# EAGLE board sonar-4up (EAGLE 9.5.2)
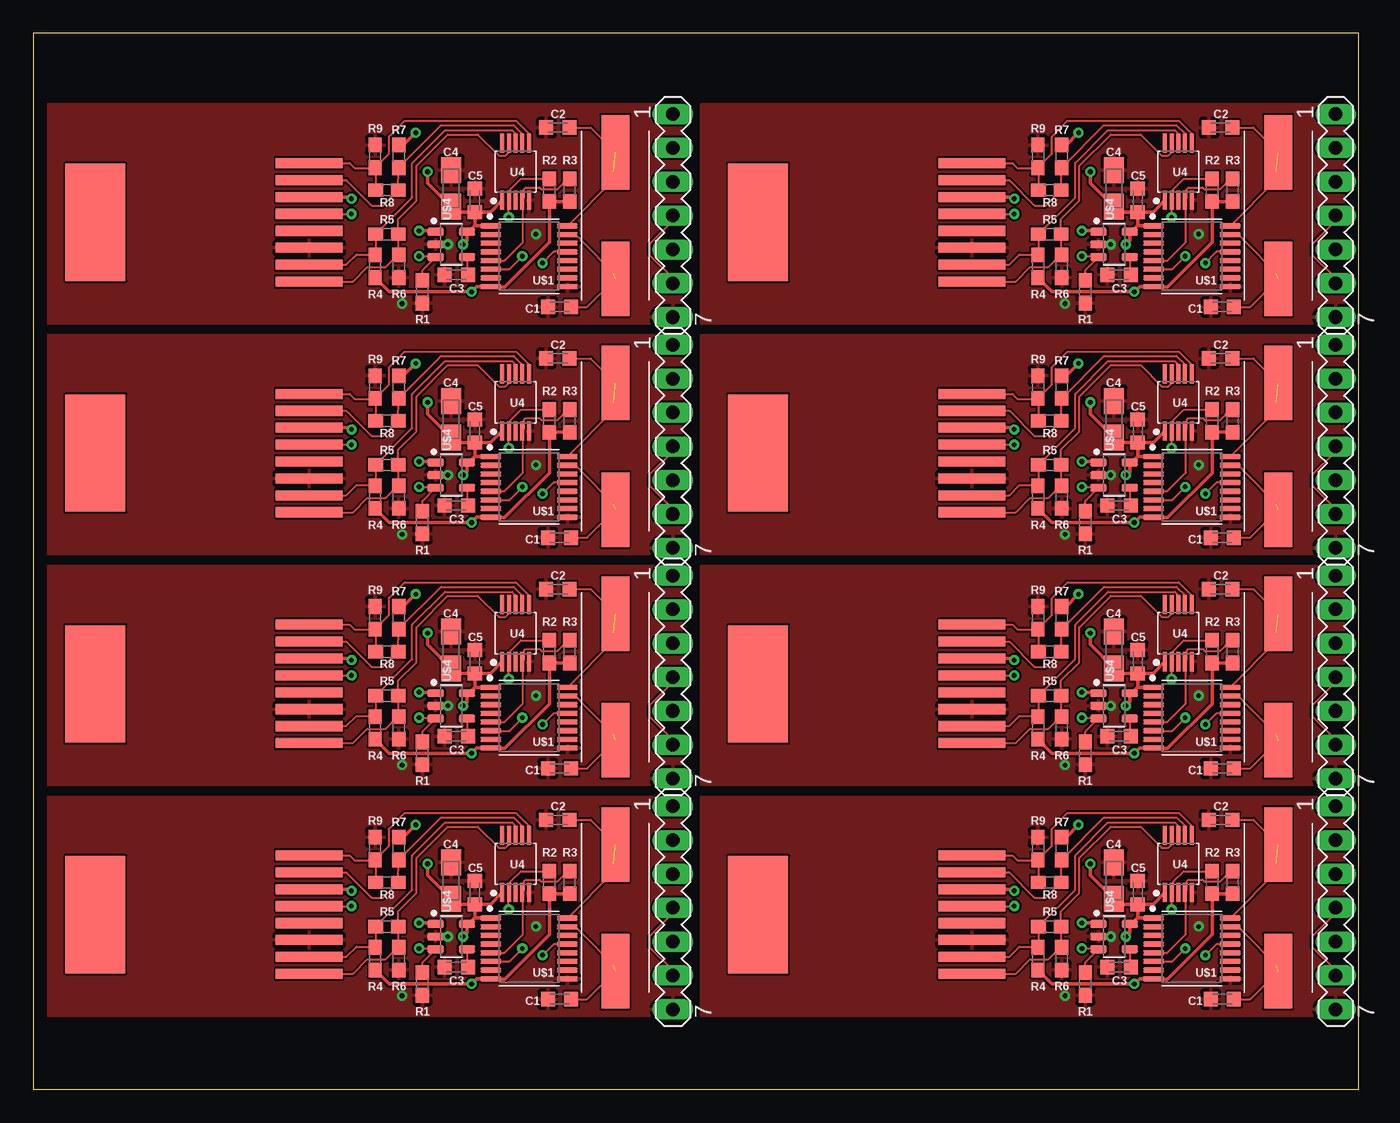
[diagram p0: board, top side]
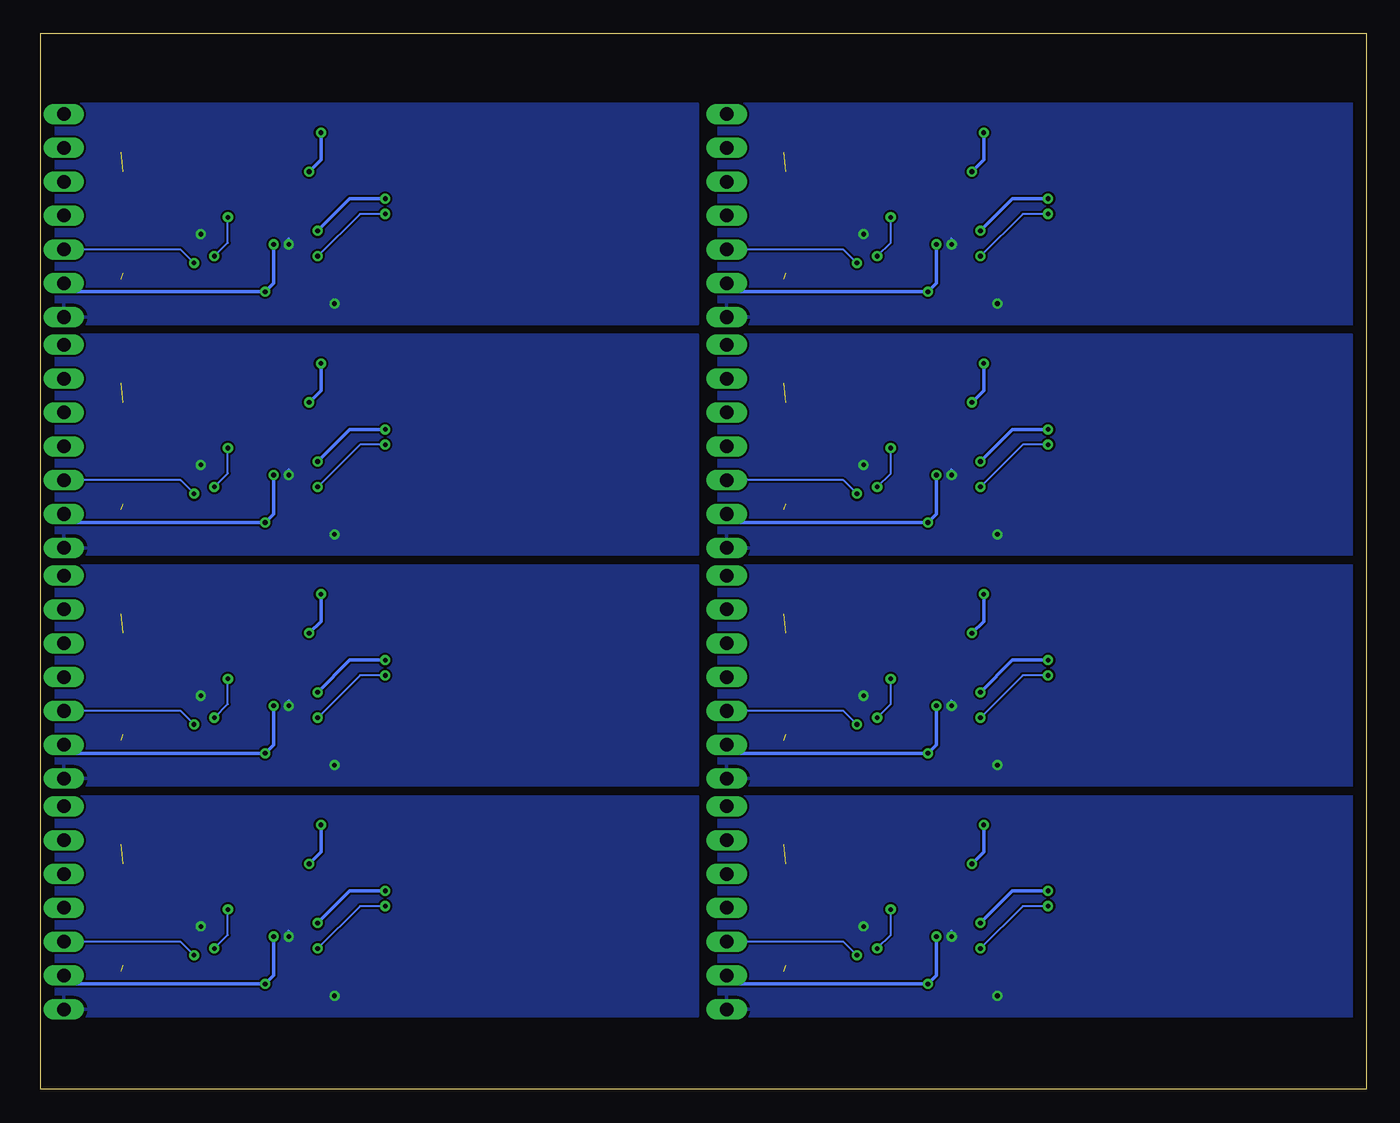
[diagram p1: board, bottom side, seen from below]

Size 99.5 x 79.28 mm. Coordinates in mm from the lower left corner, seen from the top.
Outline: 0,0 99.5,0 99.5,22.32 99.5,39.64 99.5,56.96 99.5,79.28 0,79.28 0,56.96 0,39.64 0,22.32 0,0
Copper layers (1*16): Top 0.035mm / dielectric 1.5mm / Bottom 0.035mm
Design rules "default": minimum track width 6mil, minimum drill 0.35mm, track to track 6mil, track to pad 6mil, pad to pad 6mil, via to via 6mil, smd to smd 6mil, copper to edge 40mil, drill to drill 6mil, minimum pad ring 10mil, minimum via ring 8mil, stop-mask expansion 4mil, vias tented up to drill 0mil, thermal gap 10mil

## Footprints (pad centres in the part's own frame; a part is rotated, then mirrored left to right if it is on the bottom)
C0603K = smd 1.05 x 1.08: 1 -0.875,0; 2 0.875,0
A/3216-18R = smd 1.95 x 1.5: + 1.375,0; - -1.375,0
85513-5009 = smd 0.76 x 5: 1 4.445,0; 2 3.175,0; 3 1.905,0; 4 0.635,0; 5 -0.635,0; 6 -1.905,0; 7 -3.175,0; 8 -4.445,0 | smd 8.8 x 4.5: P$1 0,16.05
0603 = smd 1.1 x 1: 1 -0.85,0; 2 0.85,0
MA07-1 = drill 1.016 long: 1 -7.62,0; 2 -5.08,0; 3 -2.54,0; 4 0,0; 5 2.54,0; 6 5.08,0; 7 7.62,0
SOP50P490X110-10 = smd 1.438 x 0.297: 1 -2.145,1; 2 -2.145,0.5; 3 -2.145,0; 4 -2.145,-0.5; 5 -2.145,-1; 6 2.145,-1; 7 2.145,-0.5; 8 2.145,0; 9 2.145,0.5; 10 2.145,1
SOP65P640X110-16 = smd 1.572 x 0.407: 1 -2.872,2.275; 2 -2.872,1.625; 3 -2.872,0.975; 4 -2.872,0.325; 5 -2.872,-0.325; 6 -2.872,-0.975; 7 -2.872,-1.625; 8 -2.872,-2.275; 9 2.872,-2.275; 10 2.872,-1.625; 11 2.872,-0.975; 12 2.872,-0.325; 13 2.872,0.325; 14 2.872,0.975; 15 2.872,1.625; 16 2.872,2.275
ABLS = smd 5.588 x 2.108: P$1 -4.75,0; P$2 4.75,0
SOT95P280X145-5 = smd 1.262 x 0.609: 1 -1.175,0.95; 2 -1.175,0; 3 -1.175,-0.95; 4 1.175,-0.95; 5 1.175,0.95

## Placement (x,y rotation side)
C1  22pf  [C0603K]  39.5,6.78 180 top
C2  33pf  [C0603K]  39.37,20.24 180 top
C3  [C0603K]  31.75,9.19 180 top
C4  6.8uf  [A/3216-18R]  31.37,15.67 270 top
C5  .1uf  [C0603K]  33.15,14.78 90 top
C6  22pf  [C0603K]  39.5,24.1 180 top
C7  33pf  [C0603K]  39.37,37.56 180 top
C8  [C0603K]  31.75,26.51 180 top
C9  6.8uf  [A/3216-18R]  31.37,32.99 270 top
C10  .1uf  [C0603K]  33.15,32.1 90 top
C11  22pf  [C0603K]  39.5,41.42 180 top
C12  33pf  [C0603K]  39.37,54.88 180 top
C13  [C0603K]  31.75,43.83 180 top
C14  6.8uf  [A/3216-18R]  31.37,50.31 270 top
C15  .1uf  [C0603K]  33.15,49.42 90 top
C16  22pf  [C0603K]  39.5,58.74 180 top
C17  33pf  [C0603K]  39.37,72.2 180 top
C18  [C0603K]  31.75,61.15 180 top
C19  6.8uf  [A/3216-18R]  31.37,67.63 270 top
C20  .1uf  [C0603K]  33.15,66.74 90 top
C21  22pf  [C0603K]  89.25,6.78 180 top
C22  33pf  [C0603K]  89.12,20.24 180 top
C23  [C0603K]  81.5,9.19 180 top
C24  6.8uf  [A/3216-18R]  81.12,15.67 270 top
C25  .1uf  [C0603K]  82.9,14.78 90 top
C26  22pf  [C0603K]  89.25,24.1 180 top
C27  33pf  [C0603K]  89.12,37.56 180 top
C28  [C0603K]  81.5,26.51 180 top
C29  6.8uf  [A/3216-18R]  81.12,32.99 270 top
C30  .1uf  [C0603K]  82.9,32.1 90 top
C31  22pf  [C0603K]  89.25,41.42 180 top
C32  33pf  [C0603K]  89.12,54.88 180 top
C33  [C0603K]  81.5,43.83 180 top
C34  6.8uf  [A/3216-18R]  81.12,50.31 270 top
C35  .1uf  [C0603K]  82.9,49.42 90 top
C36  22pf  [C0603K]  89.25,58.74 180 top
C37  33pf  [C0603K]  89.12,72.2 180 top
C38  [C0603K]  81.5,61.15 180 top
C39  6.8uf  [A/3216-18R]  81.12,67.63 270 top
C40  .1uf  [C0603K]  82.9,66.74 90 top
J1  95501-6889VERT  [85513-5009]  20.7,30.45 90 top
J2  95501-6889VERT  [85513-5009]  20.7,13.13 90 top
J3  95501-6889VERT  [85513-5009]  20.7,47.77 90 top
J4  95501-6889VERT  [85513-5009]  20.7,65.09 90 top
J5  95501-6889VERT  [85513-5009]  70.45,13.13 90 top
J6  95501-6889VERT  [85513-5009]  70.45,30.45 90 top
J7  95501-6889VERT  [85513-5009]  70.45,47.77 90 top
J8  95501-6889VERT  [85513-5009]  70.45,65.09 90 top
R1  100k  [0603]  29.21,7.92 90 top
R2  4.7k  [0603]  38.74,15.54 90 top
R3  4.7k  [0603]  40.26,15.54 90 top
R4  330  [0603]  25.65,9.83 270 top
R5  100  [0603]  26.54,12.24 180 top
R6  300  [0603]  27.43,9.83 90 top
R7  330  [0603]  27.43,18.08 90 top
R8  100  [0603]  26.54,15.54 0 top
R9  300  [0603]  25.65,18.08 270 top
R10  100k  [0603]  29.21,25.24 90 top
R11  4.7k  [0603]  38.74,32.86 90 top
R12  4.7k  [0603]  40.26,32.86 90 top
R13  330  [0603]  25.65,27.15 270 top
R14  100  [0603]  26.54,29.56 180 top
R15  300  [0603]  27.43,27.15 90 top
R16  330  [0603]  27.43,35.4 90 top
R17  100  [0603]  26.54,32.86 0 top
R18  300  [0603]  25.65,35.4 270 top
R19  100k  [0603]  29.21,42.56 90 top
R20  4.7k  [0603]  38.74,50.18 90 top
R21  4.7k  [0603]  40.26,50.18 90 top
R22  330  [0603]  25.65,44.47 270 top
R23  100  [0603]  26.54,46.88 180 top
R24  300  [0603]  27.43,44.47 90 top
R25  330  [0603]  27.43,52.72 90 top
R26  100  [0603]  26.54,50.18 0 top
R27  300  [0603]  25.65,52.72 270 top
R28  100k  [0603]  29.21,59.88 90 top
R29  4.7k  [0603]  38.74,67.5 90 top
R30  4.7k  [0603]  40.26,67.5 90 top
R31  330  [0603]  25.65,61.79 270 top
R32  100  [0603]  26.54,64.2 180 top
R33  300  [0603]  27.43,61.79 90 top
R34  330  [0603]  27.43,70.04 90 top
R35  100  [0603]  26.54,67.5 0 top
R36  300  [0603]  25.65,70.04 270 top
R37  100k  [0603]  78.96,7.92 90 top
R38  4.7k  [0603]  88.49,15.54 90 top
R39  4.7k  [0603]  90.01,15.54 90 top
R40  330  [0603]  75.4,9.83 270 top
R41  100  [0603]  76.29,12.24 180 top
R42  300  [0603]  77.18,9.83 90 top
R43  330  [0603]  77.18,18.08 90 top
R44  100  [0603]  76.29,15.54 0 top
R45  300  [0603]  75.4,18.08 270 top
R46  100k  [0603]  78.96,25.24 90 top
R47  4.7k  [0603]  88.49,32.86 90 top
R48  4.7k  [0603]  90.01,32.86 90 top
R49  330  [0603]  75.4,27.15 270 top
R50  100  [0603]  76.29,29.56 180 top
R51  300  [0603]  77.18,27.15 90 top
R52  330  [0603]  77.18,35.4 90 top
R53  100  [0603]  76.29,32.86 0 top
R54  300  [0603]  75.4,35.4 270 top
R55  100k  [0603]  78.96,42.56 90 top
R56  4.7k  [0603]  88.49,50.18 90 top
R57  4.7k  [0603]  90.01,50.18 90 top
R58  330  [0603]  75.4,44.47 270 top
R59  100  [0603]  76.29,46.88 180 top
R60  300  [0603]  77.18,44.47 90 top
R61  330  [0603]  77.18,52.72 90 top
R62  100  [0603]  76.29,50.18 0 top
R63  300  [0603]  75.4,52.72 270 top
R64  100k  [0603]  78.96,59.88 90 top
R65  4.7k  [0603]  88.49,67.5 90 top
R66  4.7k  [0603]  90.01,67.5 90 top
R67  330  [0603]  75.4,61.79 270 top
R68  100  [0603]  76.29,64.2 180 top
R69  300  [0603]  77.18,61.79 90 top
R70  330  [0603]  77.18,70.04 90 top
R71  100  [0603]  76.29,67.5 0 top
R72  300  [0603]  75.4,70.04 270 top
SV1  [MA07-1]  48.01,13.64 270 top
SV2  [MA07-1]  48.01,30.96 270 top
SV3  [MA07-1]  48.01,48.28 270 top
SV4  [MA07-1]  48.01,65.6 270 top
SV5  [MA07-1]  97.76,13.64 270 top
SV6  [MA07-1]  97.76,30.96 270 top
SV7  [MA07-1]  97.76,48.28 270 top
SV8  [MA07-1]  97.76,65.6 270 top
U1  PCA9615  [SOP50P490X110-10]  36.2,34.26 90 top
U2  PCA9615  [SOP50P490X110-10]  36.2,51.58 90 top
U3  PCA9615  [SOP50P490X110-10]  36.2,68.9 90 top
U4  PCA9615  [SOP50P490X110-10]  36.2,16.94 90 top
U5  PCA9615  [SOP50P490X110-10]  85.95,16.94 90 top
U6  PCA9615  [SOP50P490X110-10]  85.95,34.26 90 top
U7  PCA9615  [SOP50P490X110-10]  85.95,51.58 90 top
U8  PCA9615  [SOP50P490X110-10]  85.95,68.9 90 top
U$1  SC16IS740  [SOP65P640X110-16]  37.21,10.59 0 top
U$2  SC16IS740  [SOP65P640X110-16]  37.21,27.91 0 top
U$3  ABLS-3.6864MHZ-B4-T  [ABLS]  43.69,13.64 90 top
U$4  MIC5219-3.3YM5-TR  [SOT95P280X145-5]  31.37,11.48 0 top
U$5  ABLS-3.6864MHZ-B4-T  [ABLS]  43.69,30.96 90 top
U$6  MIC5219-3.3YM5-TR  [SOT95P280X145-5]  31.37,28.8 0 top
U$7  SC16IS740  [SOP65P640X110-16]  37.21,45.23 0 top
U$8  ABLS-3.6864MHZ-B4-T  [ABLS]  43.69,48.28 90 top
U$9  MIC5219-3.3YM5-TR  [SOT95P280X145-5]  31.37,46.12 0 top
U$10  SC16IS740  [SOP65P640X110-16]  37.21,62.55 0 top
U$11  ABLS-3.6864MHZ-B4-T  [ABLS]  43.69,65.6 90 top
U$12  MIC5219-3.3YM5-TR  [SOT95P280X145-5]  31.37,63.44 0 top
U$13  SC16IS740  [SOP65P640X110-16]  86.96,10.59 0 top
U$14  ABLS-3.6864MHZ-B4-T  [ABLS]  93.44,13.64 90 top
U$15  MIC5219-3.3YM5-TR  [SOT95P280X145-5]  81.12,11.48 0 top
U$16  SC16IS740  [SOP65P640X110-16]  86.96,27.91 0 top
U$17  ABLS-3.6864MHZ-B4-T  [ABLS]  93.44,30.96 90 top
U$18  MIC5219-3.3YM5-TR  [SOT95P280X145-5]  81.12,28.8 0 top
U$19  SC16IS740  [SOP65P640X110-16]  86.96,45.23 0 top
U$20  ABLS-3.6864MHZ-B4-T  [ABLS]  93.44,48.28 90 top
U$21  MIC5219-3.3YM5-TR  [SOT95P280X145-5]  81.12,46.12 0 top
U$22  SC16IS740  [SOP65P640X110-16]  86.96,62.55 0 top
U$23  ABLS-3.6864MHZ-B4-T  [ABLS]  93.44,65.6 90 top
U$24  MIC5219-3.3YM5-TR  [SOT95P280X145-5]  81.12,63.44 0 top

## Library data of the parts
C1-C40 = rcl; SPICEPREFIX: C
J1-J8 U1-U8 U$1-U$24 = Conservify
R1-R72 = SparkFun-Resistors; PROD_ID: RES-07828
SV1-SV8 = con-lstb; OC_FARNELL: unknown; OC_NEWARK: unknown

## Nets
3V1: C9.+ C10.1 R11.1 R12.1 R13.2 R16.2 SV2.4 SV2.6 U1.1 U$2.1 U$2.8 U$6.5
3V2: C14.+ C15.1 R20.1 R21.1 R22.2 R25.2 SV3.4 SV3.6 U2.1 U$7.1 U$7.8 U$9.5
3V3: C4.+ C5.1 R2.1 R3.1 R4.2 R7.2 SV1.4 SV1.6 U4.1 U$1.1 U$1.8 U$4.5
3V4: C19.+ C20.1 R29.1 R30.1 R31.2 R34.2 SV4.4 SV4.6 U3.1 U$10.1 U$10.8 U$12.5
3V5: C24.+ C25.1 R38.1 R39.1 R40.2 R43.2 SV5.4 SV5.6 U5.1 U$13.1 U$13.8 U$15.5
3V6: C29.+ C30.1 R47.1 R48.1 R49.2 R52.2 SV6.4 SV6.6 U6.1 U$16.1 U$16.8 U$18.5
3V7: C34.+ C35.1 R56.1 R57.1 R58.2 R61.2 SV7.4 SV7.6 U7.1 U$19.1 U$19.8 U$21.5
3V8: C39.+ C40.1 R65.1 R66.1 R67.2 R70.2 SV8.4 SV8.6 U8.1 U$22.1 U$22.8 U$24.5
A0: U$1.2
A1: U$1.3
A2: U$2.2
A3: U$2.3
A4: U$7.2
A5: U$7.3
A6: U$10.2
A7: U$10.3
A8: U$13.2
A9: U$13.3
A10: U$16.2
A11: U$16.3
A12: U$19.2
A13: U$19.3
A14: U$22.2
A15: U$22.3
EN: U4.3
EN1: U1.3
EN2: U2.3
EN3: U3.3
EN4: U5.3
EN5: U6.3
EN6: U7.3
EN7: U8.3
ENABLE: J2.4 R1.2 U$4.3
ENABLE1: J1.4 R10.2 U$6.3
ENABLE2: J3.4 R19.2 U$9.3
ENABLE3: J4.4 R28.2 U$12.3
ENABLE4: J5.4 R37.2 U$15.3
ENABLE5: J6.4 R46.2 U$18.3
ENABLE6: J7.4 R55.2 U$21.3
ENABLE7: J8.4 R64.2 U$24.3
GND: C1.2 C2.2 C3.2 C4.- C5.2 J2.6 R1.1 R6.1 R9.1 SV1.7 U4.5 U$1.9 U$4.2
GND1: C6.2 C7.2 C8.2 C9.- C10.2 J1.6 R10.1 R15.1 R18.1 SV2.7 U1.5 U$2.9 U$6.2
GND2: C11.2 C12.2 C13.2 C14.- C15.2 J3.6 R19.1 R24.1 R27.1 SV3.7 U2.5 U$7.9 U$9.2
GND3: C16.2 C17.2 C18.2 C19.- C20.2 J4.6 R28.1 R33.1 R36.1 SV4.7 U3.5 U$10.9 U$12.2
GND4: C21.2 C22.2 C23.2 C24.- C25.2 J5.6 R37.1 R42.1 R45.1 SV5.7 U5.5 U$13.9 U$15.2
GND5: C26.2 C27.2 C28.2 C29.- C30.2 J6.6 R46.1 R51.1 R54.1 SV6.7 U6.5 U$16.9 U$18.2
GND6: C31.2 C32.2 C33.2 C34.- C35.2 J7.6 R55.1 R60.1 R63.1 SV7.7 U7.5 U$19.9 U$21.2
GND7: C36.2 C37.2 C38.2 C39.- C40.2 J8.6 R64.1 R69.1 R72.1 SV8.7 U8.5 U$22.9 U$24.2
INT: U$1.7
INT1: U$2.7
INT2: U$7.7
INT3: U$10.7
INT4: U$13.7
INT5: U$16.7
INT6: U$19.7
INT7: U$22.7
LCL-M: J2.1 R8.1 R9.2 U4.6
LCL-M1: J1.1 R17.1 R18.2 U1.6
LCL-M2: J3.1 R26.1 R27.2 U2.6
LCL-M3: J4.1 R35.1 R36.2 U3.6
LCL-M4: J5.1 R44.1 R45.2 U5.6
LCL-M5: J6.1 R53.1 R54.2 U6.6
LCL-M6: J7.1 R62.1 R63.2 U7.6
LCL-M7: J8.1 R71.1 R72.2 U8.6
LCL-P: J2.2 R7.1 R8.2 U4.7
LCL-P1: J1.2 R16.1 R17.2 U1.7
LCL-P2: J3.2 R25.1 R26.2 U2.7
LCL-P3: J4.2 R34.1 R35.2 U3.7
LCL-P4: J5.2 R43.1 R44.2 U5.7
LCL-P5: J6.2 R52.1 R53.2 U6.7
LCL-P6: J7.2 R61.1 R62.2 U7.7
LCL-P7: J8.2 R70.1 R71.2 U8.7
LDA-M: J2.8 R5.1 R6.2 U4.9
LDA-M1: J1.8 R14.1 R15.2 U1.9
LDA-M2: J3.8 R23.1 R24.2 U2.9
LDA-M3: J4.8 R32.1 R33.2 U3.9
LDA-M4: J5.8 R41.1 R42.2 U5.9
LDA-M5: J6.8 R50.1 R51.2 U6.9
LDA-M6: J7.8 R59.1 R60.2 U7.9
LDA-M7: J8.8 R68.1 R69.2 U8.9
LDA-P: J2.7 R4.1 R5.2 U4.8
LDA-P1: J1.7 R13.1 R14.2 U1.8
LDA-P2: J3.7 R22.1 R23.2 U2.8
LDA-P3: J4.7 R31.1 R32.2 U3.8
LDA-P4: J5.7 R40.1 R41.2 U5.8
LDA-P5: J6.7 R49.1 R50.2 U6.8
LDA-P6: J7.7 R58.1 R59.2 U7.8
LDA-P7: J8.7 R67.1 R68.2 U8.8
N$1: U$1.14
N$2: C3.1 U$4.4
N$3: U$2.14
N$4: C8.1 U$6.4
N$5: U4.10
N$6: U1.10
N$7: U$7.14
N$8: C13.1 U$9.4
N$9: U2.10
N$10: U$10.14
N$11: C18.1 U$12.4
N$12: U3.10
N$13: U$13.14
N$14: C23.1 U$15.4
N$15: U5.10
N$16: U$16.14
N$17: C28.1 U$18.4
N$18: U6.10
N$19: U$19.14
N$20: C33.1 U$21.4
N$21: U7.10
N$22: U$22.14
N$23: C38.1 U$24.4
N$24: U8.10
SCL: R3.2 U4.4 U$1.5
SCL1: R12.2 U1.4 U$2.5
SCL2: R21.2 U2.4 U$7.5
SCL3: R30.2 U3.4 U$10.5
SCL4: R39.2 U5.4 U$13.5
SCL5: R48.2 U6.4 U$16.5
SCL6: R57.2 U7.4 U$19.5
SCL7: R66.2 U8.4 U$22.5
SDA: R2.2 U4.2 U$1.6
SDA1: R11.2 U1.2 U$2.6
SDA2: R20.2 U2.2 U$7.6
SDA3: R29.2 U3.2 U$10.6
SDA4: R38.2 U5.2 U$13.6
SDA5: R47.2 U6.2 U$16.6
SDA6: R56.2 U7.2 U$19.6
SDA7: R65.2 U8.2 U$22.6
SERIAL: SV1.5 U$1.13
SERIAL1: SV2.5 U$2.13
SERIAL2: SV3.5 U$7.13
SERIAL3: SV4.5 U$10.13
SERIAL4: SV5.5 U$13.13
SERIAL5: SV6.5 U$16.13
SERIAL6: SV7.5 U$19.13
SERIAL7: SV8.5 U$22.13
UNREG: J2.3 U$4.1
UNREG1: J1.3 U$6.1
UNREG2: J3.3 U$9.1
UNREG3: J4.3 U$12.1
UNREG4: J5.3 U$15.1
UNREG5: J6.3 U$18.1
UNREG6: J7.3 U$21.1
UNREG7: J8.3 U$24.1
XTAL1: C1.1 U$1.15 U$3.P$1
XTAL2: C2.1 U$1.16 U$3.P$2
XTAL3: C6.1 U$2.15 U$5.P$1
XTAL4: C7.1 U$2.16 U$5.P$2
XTAL5: C11.1 U$7.15 U$8.P$1
XTAL6: C12.1 U$7.16 U$8.P$2
XTAL7: C16.1 U$10.15 U$11.P$1
XTAL8: C17.1 U$10.16 U$11.P$2
XTAL9: C21.1 U$13.15 U$14.P$1
XTAL10: C22.1 U$13.16 U$14.P$2
XTAL11: C26.1 U$16.15 U$17.P$1
XTAL12: C27.1 U$16.16 U$17.P$2
XTAL13: C31.1 U$19.15 U$20.P$1
XTAL14: C32.1 U$19.16 U$20.P$2
XTAL15: C36.1 U$22.15 U$23.P$1
XTAL16: C37.1 U$22.16 U$23.P$2

## Tracks (layer width: path | path; a pad name or v marks a point on that pad's centre or on a via)
3V1  (via drill 0.35)
  Top 0.152: 33.15,30.22 33.15,30.45 | 31.76,31.22 C9.+ | SV2.4 48.01,30.58 46.25,28.83 46.25,28 48.01,26.25 SV2.6
  Top 0.254: 33.15,30.22 32.67,29.75 U$6.5 32.54,29.08 v32.26,28.8 | C10.1 33.15,30.45 33.15,30.19 34.33,30.19 U$2.1 | C10.1 31.76,31.22 | C10.1 34.31,31.22 U1.1 | R13.2 26.71,25.24 v32.89,25.24 33.28,25.63 U$2.8 34.38,25.6 35.38,25.6 38.73,28.95 R11.1 R12.1 | C9.+ 29.59,33.39 v29.59,34.26 | v28.7,37.18 27.77,36.25 R16.2
  Bottom 0.254: v32.26,28.8 32.26,25.88 v32.89,25.24 47.37,25.24 SV2.6 | v29.59,34.26 28.7,35.15 v28.7,37.18
3V2  (via drill 0.35)
  Top 0.152: 33.15,47.54 33.15,47.77 | 31.76,48.54 C14.+ | SV3.4 48.01,47.9 46.25,46.15 46.25,45.33 48.01,43.57 SV3.6
  Top 0.254: 33.15,47.54 32.67,47.07 U$9.5 32.54,46.4 v32.26,46.12 | C15.1 33.15,47.77 33.15,47.51 34.33,47.51 U$7.1 | C15.1 31.76,48.54 | C15.1 34.31,48.54 U2.1 | R22.2 26.71,42.56 v32.89,42.56 33.28,42.95 U$7.8 34.38,42.92 35.38,42.92 38.73,46.27 R20.1 R21.1 | C14.+ 29.59,50.71 v29.59,51.58 | v28.7,54.5 27.77,53.57 R25.2
  Bottom 0.254: v32.26,46.12 32.26,43.2 v32.89,42.56 47.37,42.56 SV3.6 | v29.59,51.58 28.7,52.47 v28.7,54.5
3V3  (via drill 0.35)
  Top 0.152: 33.15,12.9 33.15,13.13 | 31.76,13.9 C4.+ | SV1.4 48.01,13.26 46.25,11.51 46.25,10.68 48.01,8.93 SV1.6
  Top 0.254: 33.15,12.9 32.67,12.43 U$4.5 32.54,11.76 v32.26,11.48 | C5.1 33.15,13.13 33.15,12.87 34.33,12.87 U$1.1 | C5.1 31.76,13.9 | C5.1 34.31,13.9 U4.1 | R4.2 26.71,7.92 v32.89,7.92 33.28,8.31 U$1.8 34.38,8.28 35.38,8.28 38.73,11.63 R2.1 R3.1 | C4.+ 29.59,16.07 v29.59,16.94 | v28.7,19.86 27.77,18.93 R7.2
  Bottom 0.254: v32.26,11.48 32.26,8.56 v32.89,7.92 47.37,7.92 SV1.6 | v29.59,16.94 28.7,17.83 v28.7,19.86
3V4  (via drill 0.35)
  Top 0.152: 33.15,64.86 33.15,65.09 | 31.76,65.86 C19.+ | SV4.4 48.01,65.22 46.25,63.47 46.25,62.65 48.01,60.89 SV4.6
  Top 0.254: 33.15,64.86 32.67,64.39 U$12.5 32.54,63.72 v32.26,63.44 | C20.1 33.15,65.09 33.15,64.83 34.33,64.83 U$10.1 | C20.1 31.76,65.86 | C20.1 34.31,65.86 U3.1 | R31.2 26.71,59.88 v32.89,59.88 33.28,60.27 U$10.8 34.38,60.24 35.38,60.24 38.73,63.59 R29.1 R30.1 | C19.+ 29.59,68.03 v29.59,68.9 | v28.7,71.82 27.77,70.89 R34.2
  Bottom 0.254: v32.26,63.44 32.26,60.52 v32.89,59.88 47.37,59.88 SV4.6 | v29.59,68.9 28.7,69.79 v28.7,71.82
3V5  (via drill 0.35)
  Top 0.152: 82.9,12.9 82.9,13.13 | 81.51,13.9 C24.+ | SV5.4 97.76,13.26 96,11.51 96,10.68 97.76,8.93 SV5.6
  Top 0.254: 82.9,12.9 82.42,12.43 U$15.5 82.29,11.76 v82.01,11.48 | C25.1 82.9,13.13 82.9,12.87 84.08,12.87 U$13.1 | C25.1 81.51,13.9 | C25.1 84.06,13.9 U5.1 | R40.2 76.46,7.92 v82.64,7.92 83.03,8.31 U$13.8 84.13,8.28 85.13,8.28 88.48,11.63 R38.1 R39.1 | C24.+ 79.34,16.07 v79.34,16.94 | v78.45,19.86 77.52,18.93 R43.2
  Bottom 0.254: v82.01,11.48 82.01,8.56 v82.64,7.92 97.12,7.92 SV5.6 | v79.34,16.94 78.45,17.83 v78.45,19.86
3V6  (via drill 0.35)
  Top 0.152: 82.9,30.22 82.9,30.45 | 81.51,31.22 C29.+ | SV6.4 97.76,30.58 96,28.83 96,28 97.76,26.25 SV6.6
  Top 0.254: 82.9,30.22 82.42,29.75 U$18.5 82.29,29.08 v82.01,28.8 | C30.1 82.9,30.45 82.9,30.19 84.08,30.19 U$16.1 | C30.1 81.51,31.22 | C30.1 84.06,31.22 U6.1 | R49.2 76.46,25.24 v82.64,25.24 83.03,25.63 U$16.8 84.13,25.6 85.13,25.6 88.48,28.95 R47.1 R48.1 | C29.+ 79.34,33.39 v79.34,34.26 | v78.45,37.18 77.52,36.25 R52.2
  Bottom 0.254: v82.01,28.8 82.01,25.88 v82.64,25.24 97.12,25.24 SV6.6 | v79.34,34.26 78.45,35.15 v78.45,37.18
3V7  (via drill 0.35)
  Top 0.152: 82.9,47.54 82.9,47.77 | 81.51,48.54 C34.+ | SV7.4 97.76,47.9 96,46.15 96,45.33 97.76,43.57 SV7.6
  Top 0.254: 82.9,47.54 82.42,47.07 U$21.5 82.29,46.4 v82.01,46.12 | C35.1 82.9,47.77 82.9,47.51 84.08,47.51 U$19.1 | C35.1 81.51,48.54 | C35.1 84.06,48.54 U7.1 | R58.2 76.46,42.56 v82.64,42.56 83.03,42.95 U$19.8 84.13,42.92 85.13,42.92 88.48,46.27 R56.1 R57.1 | C34.+ 79.34,50.71 v79.34,51.58 | v78.45,54.5 77.52,53.57 R61.2
  Bottom 0.254: v82.01,46.12 82.01,43.2 v82.64,42.56 97.12,42.56 SV7.6 | v79.34,51.58 78.45,52.47 v78.45,54.5
3V8  (via drill 0.35)
  Top 0.152: 82.9,64.86 82.9,65.09 | 81.51,65.86 C39.+ | SV8.4 97.76,65.22 96,63.47 96,62.65 97.76,60.89 SV8.6
  Top 0.254: 82.9,64.86 82.42,64.39 U$24.5 82.29,63.72 v82.01,63.44 | C40.1 82.9,65.09 82.9,64.83 84.08,64.83 U$22.1 | C40.1 81.51,65.86 | C40.1 84.06,65.86 U8.1 | R67.2 76.46,59.88 v82.64,59.88 83.03,60.27 U$22.8 84.13,60.24 85.13,60.24 88.48,63.59 R65.1 R66.1 | C39.+ 79.34,68.03 v79.34,68.9 | v78.45,71.82 77.52,70.89 R70.2
  Bottom 0.254: v82.01,63.44 82.01,60.52 v82.64,59.88 97.12,59.88 SV8.6 | v79.34,68.9 78.45,69.79 v78.45,71.82
ENABLE  (via drill 0.35)
  Top 0.152: R1.2 29.21,9.54 U$4.3 30.13,10.59 v28.96,10.59 | J2.4 v23.88,13.76
  Bottom 0.152: v23.88,13.76 25.78,13.76 v28.96,10.59
ENABLE1  (via drill 0.35)
  Top 0.152: R10.2 29.21,26.86 U$6.3 30.13,27.91 v28.96,27.91 | J1.4 v23.88,31.08
  Bottom 0.152: v23.88,31.08 25.78,31.08 v28.96,27.91
ENABLE2  (via drill 0.35)
  Top 0.152: R19.2 29.21,44.18 U$9.3 30.13,45.23 v28.96,45.23 | J3.4 v23.88,48.4
  Bottom 0.152: v23.88,48.4 25.78,48.4 v28.96,45.23
ENABLE3  (via drill 0.35)
  Top 0.152: R28.2 29.21,61.5 U$12.3 30.13,62.55 v28.96,62.55 | J4.4 v23.88,65.72
  Bottom 0.152: v23.88,65.72 25.78,65.72 v28.96,62.55
ENABLE4  (via drill 0.35)
  Top 0.152: R37.2 78.96,9.54 U$15.3 79.88,10.59 v78.71,10.59 | J5.4 v73.63,13.76
  Bottom 0.152: v73.63,13.76 75.53,13.76 v78.71,10.59
ENABLE5  (via drill 0.35)
  Top 0.152: R46.2 78.96,26.86 U$18.3 79.88,27.91 v78.71,27.91 | J6.4 v73.63,31.08
  Bottom 0.152: v73.63,31.08 75.53,31.08 v78.71,27.91
ENABLE6  (via drill 0.35)
  Top 0.152: R55.2 78.96,44.18 U$21.3 79.88,45.23 v78.71,45.23 | J7.4 v73.63,48.4
  Bottom 0.152: v73.63,48.4 75.53,48.4 v78.71,45.23
ENABLE7  (via drill 0.35)
  Top 0.152: R64.2 78.96,61.5 U$24.3 79.88,62.55 v78.71,62.55 | J8.4 v73.63,65.72
  Bottom 0.152: v73.63,65.72 75.53,65.72 v78.71,62.55
GND  (via drill 0.35)
  Top 0.254: U$4.2 v31.11,11.48
  Bottom 0.254: v31.11,11.48 31.11,11.86
  other vias: 37.72,12.24 27.69,7.03
  pour Bottom: 0.38,22.02 48.64,22.02 48.64,5.51 0.38,5.51
  pour Top: 0.38,22.02 48.64,22.02 48.64,5.51 0.38,5.51
GND1  (via drill 0.35)
  Top 0.254: U$6.2 v31.11,28.8
  Bottom 0.254: v31.11,28.8 31.11,29.18
  other vias: 37.72,29.56 27.69,24.35
  pour Bottom: 0.38,39.34 48.64,39.34 48.64,22.83 0.38,22.83
  pour Top: 0.38,39.34 48.64,39.34 48.64,22.83 0.38,22.83
GND2  (via drill 0.35)
  Top 0.254: U$9.2 v31.11,46.12
  Bottom 0.254: v31.11,46.12 31.11,46.5
  other vias: 37.72,46.88 27.69,41.67
  pour Bottom: 0.38,56.66 48.64,56.66 48.64,40.15 0.38,40.15
  pour Top: 0.38,56.66 48.64,56.66 48.64,40.15 0.38,40.15
GND3  (via drill 0.35)
  Top 0.254: U$12.2 v31.11,63.44
  Bottom 0.254: v31.11,63.44 31.11,63.82
  other vias: 37.72,64.2 27.69,58.99
  pour Bottom: 0.38,73.98 48.64,73.98 48.64,57.47 0.38,57.47
  pour Top: 0.38,73.98 48.64,73.98 48.64,57.47 0.38,57.47
GND4  (via drill 0.35)
  Top 0.254: U$15.2 v80.86,11.48
  Bottom 0.254: v80.86,11.48 80.86,11.86
  other vias: 87.47,12.24 77.44,7.03
  pour Bottom: 50.13,22.02 98.39,22.02 98.39,5.51 50.13,5.51
  pour Top: 50.13,22.02 98.39,22.02 98.39,5.51 50.13,5.51
GND5  (via drill 0.35)
  Top 0.254: U$18.2 v80.86,28.8
  Bottom 0.254: v80.86,28.8 80.86,29.18
  other vias: 87.47,29.56 77.44,24.35
  pour Bottom: 50.13,39.34 98.39,39.34 98.39,22.83 50.13,22.83
  pour Top: 50.13,39.34 98.39,39.34 98.39,22.83 50.13,22.83
GND6  (via drill 0.35)
  Top 0.254: U$21.2 v80.86,46.12
  Bottom 0.254: v80.86,46.12 80.86,46.5
  other vias: 87.47,46.88 77.44,41.67
  pour Bottom: 50.13,56.66 98.39,56.66 98.39,40.15 50.13,40.15
  pour Top: 50.13,56.66 98.39,56.66 98.39,40.15 50.13,40.15
GND7  (via drill 0.35)
  Top 0.254: U$24.2 v80.86,63.44
  Bottom 0.254: v80.86,63.44 80.86,63.82
  other vias: 87.47,64.2 77.44,58.99
  pour Bottom: 50.13,73.98 98.39,73.98 98.39,57.47 50.13,57.47
  pour Top: 50.13,73.98 98.39,73.98 98.39,57.47 50.13,57.47
LCL-M
  Top 0.152: U4.6 37.2,19.77 36.22,20.75 27.88,20.75 26.7,19.58 26.7,18.28 R9.2 | R9.2 25.69,17.19 R8.1 | J2.1 23.75,17.57 24.13,17.19 25.61,17.19 R9.2
LCL-M1
  Top 0.152: U1.6 37.2,37.09 36.22,38.07 27.88,38.07 26.7,36.9 26.7,35.6 R18.2 | R18.2 25.69,34.51 R17.1 | J1.1 23.75,34.89 24.13,34.51 25.61,34.51 R18.2
LCL-M2
  Top 0.152: U2.6 37.2,54.41 36.22,55.39 27.88,55.39 26.7,54.22 26.7,52.92 R27.2 | R27.2 25.69,51.83 R26.1 | J3.1 23.75,52.21 24.13,51.83 25.61,51.83 R27.2
LCL-M3
  Top 0.152: U3.6 37.2,71.73 36.22,72.71 27.88,72.71 26.7,71.54 26.7,70.24 R36.2 | R36.2 25.69,69.15 R35.1 | J4.1 23.75,69.53 24.13,69.15 25.61,69.15 R36.2
LCL-M4
  Top 0.152: U5.6 86.95,19.77 85.97,20.75 77.63,20.75 76.45,19.58 76.45,18.28 R45.2 | R45.2 75.44,17.19 R44.1 | J5.1 73.5,17.57 73.88,17.19 75.36,17.19 R45.2
LCL-M5
  Top 0.152: U6.6 86.95,37.09 85.97,38.07 77.63,38.07 76.45,36.9 76.45,35.6 R54.2 | R54.2 75.44,34.51 R53.1 | J6.1 73.5,34.89 73.88,34.51 75.36,34.51 R54.2
LCL-M6
  Top 0.152: U7.6 86.95,54.41 85.97,55.39 77.63,55.39 76.45,54.22 76.45,52.92 R63.2 | R63.2 75.44,51.83 R62.1 | J7.1 73.5,52.21 73.88,51.83 75.36,51.83 R63.2
LCL-M7
  Top 0.152: U8.6 86.95,71.73 85.97,72.71 77.63,72.71 76.45,71.54 76.45,70.24 R72.2 | R72.2 75.44,69.15 R71.1 | J8.1 73.5,69.53 73.88,69.15 75.36,69.15 R72.2
LCL-P
  Top 0.152: U4.7 36.7,19.77 36.06,20.41 30.61,20.41 R7.1 R8.2 26.25,14.4 25.4,14.4 23.5,16.3 J2.2
LCL-P1
  Top 0.152: U1.7 36.7,37.09 36.06,37.73 30.61,37.73 R16.1 R17.2 26.25,31.72 25.4,31.72 23.5,33.62 J1.2
LCL-P2
  Top 0.152: U2.7 36.7,54.41 36.06,55.05 30.61,55.05 R25.1 R26.2 26.25,49.04 25.4,49.04 23.5,50.94 J3.2
LCL-P3
  Top 0.152: U3.7 36.7,71.73 36.06,72.37 30.61,72.37 R34.1 R35.2 26.25,66.36 25.4,66.36 23.5,68.26 J4.2
LCL-P4
  Top 0.152: U5.7 86.45,19.77 85.81,20.41 80.36,20.41 R43.1 R44.2 76,14.4 75.15,14.4 73.25,16.3 J5.2
LCL-P5
  Top 0.152: U6.7 86.45,37.09 85.81,37.73 80.36,37.73 R52.1 R53.2 76,31.72 75.15,31.72 73.25,33.62 J6.2
LCL-P6
  Top 0.152: U7.7 86.45,54.41 85.81,55.05 80.36,55.05 R61.1 R62.2 76,49.04 75.15,49.04 73.25,50.94 J7.2
LCL-P7
  Top 0.152: U8.7 86.45,71.73 85.81,72.37 80.36,72.37 R70.1 R71.2 76,66.36 75.15,66.36 73.25,68.26 J8.2
LDA-M
  Top 0.152: U4.9 35.7,18.4 35.44,18.13 34.95,18.13 33.36,19.73 31.11,19.73 28.75,17.37 28.75,14.74 27.39,13.38 R5.1 27.39,10.71 | 27.39,10.71 R6.2 | J2.8 23.99,8.68 25.06,9.75 26.43,9.75 27.39,10.71
LDA-M1
  Top 0.152: U1.9 35.7,35.72 35.44,35.45 34.95,35.45 33.36,37.05 31.11,37.05 28.75,34.69 28.75,32.06 27.39,30.7 R14.1 27.39,28.04 | 27.39,28.04 R15.2 | J1.8 23.99,26 25.06,27.07 26.43,27.07 27.39,28.04
LDA-M2
  Top 0.152: U2.9 35.7,53.04 35.44,52.77 34.95,52.77 33.36,54.37 31.11,54.37 28.75,52.01 28.75,49.38 27.39,48.02 R23.1 27.39,45.35 | 27.39,45.35 R24.2 | J3.8 23.99,43.32 25.06,44.39 26.43,44.39 27.39,45.35
LDA-M3
  Top 0.152: U3.9 35.7,70.36 35.44,70.09 34.95,70.09 33.36,71.69 31.11,71.69 28.75,69.33 28.75,66.7 27.39,65.34 R32.1 27.39,62.67 | 27.39,62.67 R33.2 | J4.8 23.99,60.64 25.06,61.71 26.43,61.71 27.39,62.67
LDA-M4
  Top 0.152: U5.9 85.45,18.4 85.19,18.13 84.7,18.13 83.11,19.73 80.86,19.73 78.5,17.37 78.5,14.74 77.14,13.38 R41.1 77.14,10.71 | 77.14,10.71 R42.2 | J5.8 73.74,8.68 74.81,9.75 76.18,9.75 77.14,10.71
LDA-M5
  Top 0.152: U6.9 85.45,35.72 85.19,35.45 84.7,35.45 83.11,37.05 80.86,37.05 78.5,34.69 78.5,32.06 77.14,30.7 R50.1 77.14,28.04 | 77.14,28.04 R51.2 | J6.8 73.74,26 74.81,27.07 76.18,27.07 77.14,28.04
LDA-M6
  Top 0.152: U7.9 85.45,53.04 85.19,52.77 84.7,52.77 83.11,54.37 80.86,54.37 78.5,52.01 78.5,49.38 77.14,48.02 R59.1 77.14,45.35 | 77.14,45.35 R60.2 | J7.8 73.74,43.32 74.81,44.39 76.18,44.39 77.14,45.35
LDA-M7
  Top 0.152: U8.9 85.45,70.36 85.19,70.09 84.7,70.09 83.11,71.69 80.86,71.69 78.5,69.33 78.5,66.7 77.14,65.34 R68.1 77.14,62.67 | 77.14,62.67 R69.2 | J8.8 73.74,60.64 74.81,61.71 76.18,61.71 77.14,62.67
LDA-P
  Top 0.152: U4.8 36.2,19.77 35.94,20.03 30.91,20.03 28.45,17.57 28.45,14.99 R5.2 25.69,10.71 R4.1 25.61,10.71 24.26,10.71 23.5,9.95 J2.7
LDA-P1
  Top 0.152: U1.8 36.2,37.09 35.94,37.35 30.91,37.35 28.45,34.89 28.45,32.31 R14.2 25.69,28.04 R13.1 25.61,28.04 24.26,28.04 23.5,27.27 J1.7
LDA-P2
  Top 0.152: U2.8 36.2,54.41 35.94,54.67 30.91,54.67 28.45,52.21 28.45,49.63 R23.2 25.69,45.35 R22.1 25.61,45.35 24.26,45.35 23.5,44.59 J3.7
LDA-P3
  Top 0.152: U3.8 36.2,71.73 35.94,71.99 30.91,71.99 28.45,69.53 28.45,66.95 R32.2 25.69,62.67 R31.1 25.61,62.67 24.26,62.67 23.5,61.91 J4.7
LDA-P4
  Top 0.152: U5.8 85.95,19.77 85.69,20.03 80.66,20.03 78.2,17.57 78.2,14.99 R41.2 75.44,10.71 R40.1 75.36,10.71 74.01,10.71 73.25,9.95 J5.7
LDA-P5
  Top 0.152: U6.8 85.95,37.09 85.69,37.35 80.66,37.35 78.2,34.89 78.2,32.31 R50.2 75.44,28.04 R49.1 75.36,28.04 74.01,28.04 73.25,27.27 J6.7
LDA-P6
  Top 0.152: U7.8 85.95,54.41 85.69,54.67 80.66,54.67 78.2,52.21 78.2,49.63 R59.2 75.44,45.35 R58.1 75.36,45.35 74.01,45.35 73.25,44.59 J7.7
LDA-P7
  Top 0.152: U8.8 85.95,71.73 85.69,71.99 80.66,71.99 78.2,69.53 78.2,66.95 R68.2 75.44,62.67 R67.1 75.36,62.67 74.01,62.67 73.25,61.91 J8.7
N$2
  Top 0.152: U$4.4 32.54,9.27 C3.1
N$4
  Top 0.152: U$6.4 32.54,26.59 C8.1
N$8
  Top 0.152: U$9.4 32.54,43.91 C13.1
N$11
  Top 0.152: U$12.4 32.54,61.23 C18.1
N$14
  Top 0.152: U$15.4 82.29,9.27 C23.1
N$17
  Top 0.152: U$18.4 82.29,26.59 C28.1
N$20
  Top 0.152: U$21.4 82.29,43.91 C33.1
N$23
  Top 0.152: U$24.4 82.29,61.23 C38.1
SCL
  Top 0.152: U4.4 36.76,14.85 | 36.76,14.85 36.82,14.91 36.82,15.61 36.95,15.74 38.01,15.74 38.14,15.61 39.33,15.61 40.11,16.39 R3.2 | U$1.5 35.36,10.26 36.76,11.66 36.76,14.85
SCL1
  Top 0.152: U1.4 36.76,32.17 | 36.76,32.17 36.82,32.23 36.82,32.93 36.95,33.06 38.01,33.06 38.14,32.93 39.33,32.93 40.11,33.71 R12.2 | U$2.5 35.36,27.58 36.76,28.98 36.76,32.17
SCL2
  Top 0.152: U2.4 36.76,49.49 | 36.76,49.49 36.82,49.55 36.82,50.25 36.95,50.38 38.01,50.38 38.14,50.25 39.33,50.25 40.11,51.03 R21.2 | U$7.5 35.36,44.9 36.76,46.3 36.76,49.49
SCL3
  Top 0.152: U3.4 36.76,66.81 | 36.76,66.81 36.82,66.88 36.82,67.57 36.95,67.7 38.01,67.7 38.14,67.57 39.33,67.57 40.11,68.35 R30.2 | U$10.5 35.36,62.22 36.76,63.62 36.76,66.81
SCL4
  Top 0.152: U5.4 86.51,14.85 | 86.51,14.85 86.57,14.91 86.57,15.61 86.7,15.74 87.76,15.74 87.89,15.61 89.08,15.61 89.86,16.39 R39.2 | U$13.5 85.11,10.26 86.51,11.66 86.51,14.85
SCL5
  Top 0.152: U6.4 86.51,32.17 | 86.51,32.17 86.57,32.23 86.57,32.93 86.7,33.06 87.76,33.06 87.89,32.93 89.08,32.93 89.86,33.71 R48.2 | U$16.5 85.11,27.58 86.51,28.98 86.51,32.17
SCL6
  Top 0.152: U7.4 86.51,49.49 | 86.51,49.49 86.57,49.55 86.57,50.25 86.7,50.38 87.76,50.38 87.89,50.25 89.08,50.25 89.86,51.03 R57.2 | U$19.5 85.11,44.9 86.51,46.3 86.51,49.49
SCL7
  Top 0.152: U8.4 86.51,66.81 | 86.51,66.81 86.57,66.88 86.57,67.57 86.7,67.7 87.76,67.7 87.89,67.57 89.08,67.57 89.86,68.35 R66.2 | U$22.5 85.11,62.22 86.51,63.62 86.51,66.81
SDA  (via drill 0.35)
  Top 0.152: R2.2 36.6,16.39 35.82,15.61 35.82,14.91 U4.2 35.69,14.78 v35.69,13.51 | U$1.6 35.73,9.61 v36.7,10.59
  Bottom 0.152: v36.7,10.59 35.69,11.6 v35.69,13.51
SDA1  (via drill 0.35)
  Top 0.152: R11.2 36.6,33.71 35.82,32.93 35.82,32.23 U1.2 35.69,32.1 v35.69,30.83 | U$2.6 35.73,26.93 v36.7,27.91
  Bottom 0.152: v36.7,27.91 35.69,28.92 v35.69,30.83
SDA2  (via drill 0.35)
  Top 0.152: R20.2 36.6,51.03 35.82,50.25 35.82,49.55 U2.2 35.69,49.42 v35.69,48.15 | U$7.6 35.73,44.25 v36.7,45.23
  Bottom 0.152: v36.7,45.23 35.69,46.24 v35.69,48.15
SDA3  (via drill 0.35)
  Top 0.152: R29.2 36.6,68.35 35.82,67.57 35.82,66.88 U3.2 35.69,66.74 v35.69,65.47 | U$10.6 35.73,61.57 v36.7,62.55
  Bottom 0.152: v36.7,62.55 35.69,63.56 v35.69,65.47
SDA4  (via drill 0.35)
  Top 0.152: R38.2 86.35,16.39 85.57,15.61 85.57,14.91 U5.2 85.44,14.78 v85.44,13.51 | U$13.6 85.48,9.61 v86.45,10.59
  Bottom 0.152: v86.45,10.59 85.44,11.6 v85.44,13.51
SDA5  (via drill 0.35)
  Top 0.152: R47.2 86.35,33.71 85.57,32.93 85.57,32.23 U6.2 85.44,32.1 v85.44,30.83 | U$16.6 85.48,26.93 v86.45,27.91
  Bottom 0.152: v86.45,27.91 85.44,28.92 v85.44,30.83
SDA6  (via drill 0.35)
  Top 0.152: R56.2 86.35,51.03 85.57,50.25 85.57,49.55 U7.2 85.44,49.42 v85.44,48.15 | U$19.6 85.48,44.25 v86.45,45.23
  Bottom 0.152: v86.45,45.23 85.44,46.24 v85.44,48.15
SDA7  (via drill 0.35)
  Top 0.152: R65.2 86.35,68.35 85.57,67.57 85.57,66.88 U8.2 85.44,66.74 v85.44,65.47 | U$22.6 85.48,61.57 v86.45,62.55
  Bottom 0.152: v86.45,62.55 85.44,63.56 v85.44,65.47
SERIAL  (via drill 0.35)
  Top 0.152: U$1.13 39.06,10.91 v38.23,10.08
  Bottom 0.152: v38.23,10.08 39.24,11.1 SV1.5
SERIAL1  (via drill 0.35)
  Top 0.152: U$2.13 39.06,28.23 v38.23,27.4
  Bottom 0.152: v38.23,27.4 39.24,28.42 SV2.5
SERIAL2  (via drill 0.35)
  Top 0.152: U$7.13 39.06,45.55 v38.23,44.72
  Bottom 0.152: v38.23,44.72 39.24,45.74 SV3.5
SERIAL3  (via drill 0.35)
  Top 0.152: U$10.13 39.06,62.87 v38.23,62.04
  Bottom 0.152: v38.23,62.04 39.24,63.06 SV4.5
SERIAL4  (via drill 0.35)
  Top 0.152: U$13.13 88.81,10.91 v87.98,10.08
  Bottom 0.152: v87.98,10.08 88.99,11.1 SV5.5
SERIAL5  (via drill 0.35)
  Top 0.152: U$16.13 88.81,28.23 v87.98,27.4
  Bottom 0.152: v87.98,27.4 88.99,28.42 SV6.5
SERIAL6  (via drill 0.35)
  Top 0.152: U$19.13 88.81,45.55 v87.98,44.72
  Bottom 0.152: v87.98,44.72 88.99,45.74 SV7.5
SERIAL7  (via drill 0.35)
  Top 0.152: U$22.13 88.81,62.87 v87.98,62.04
  Bottom 0.152: v87.98,62.04 88.99,63.06 SV8.5
UNREG  (via drill 0.35)
  Top 0.152: 30.13,12.49 U$4.1
  Top 0.254: J2.3 23.75,15.03 v23.88,14.91 | v28.96,12.49 30.13,12.49
  Bottom 0.254: v23.88,14.91 26.54,14.91 v28.96,12.49
UNREG1  (via drill 0.35)
  Top 0.152: 30.13,29.81 U$6.1
  Top 0.254: J1.3 23.75,32.35 v23.88,32.23 | v28.96,29.81 30.13,29.81
  Bottom 0.254: v23.88,32.23 26.54,32.23 v28.96,29.81
UNREG2  (via drill 0.35)
  Top 0.152: 30.13,47.13 U$9.1
  Top 0.254: J3.3 23.75,49.67 v23.88,49.55 | v28.96,47.13 30.13,47.13
  Bottom 0.254: v23.88,49.55 26.54,49.55 v28.96,47.13
UNREG3  (via drill 0.35)
  Top 0.152: 30.13,64.45 U$12.1
  Top 0.254: J4.3 23.75,66.99 v23.88,66.87 | v28.96,64.45 30.13,64.45
  Bottom 0.254: v23.88,66.87 26.54,66.87 v28.96,64.45
UNREG4  (via drill 0.35)
  Top 0.152: 79.88,12.49 U$15.1
  Top 0.254: J5.3 73.5,15.03 v73.63,14.91 | v78.71,12.49 79.88,12.49
  Bottom 0.254: v73.63,14.91 76.29,14.91 v78.71,12.49
UNREG5  (via drill 0.35)
  Top 0.152: 79.88,29.81 U$18.1
  Top 0.254: J6.3 73.5,32.35 v73.63,32.23 | v78.71,29.81 79.88,29.81
  Bottom 0.254: v73.63,32.23 76.29,32.23 v78.71,29.81
UNREG6  (via drill 0.35)
  Top 0.152: 79.88,47.13 U$21.1
  Top 0.254: J7.3 73.5,49.67 v73.63,49.55 | v78.71,47.13 79.88,47.13
  Bottom 0.254: v73.63,49.55 76.29,49.55 v78.71,47.13
UNREG7  (via drill 0.35)
  Top 0.152: 79.88,64.45 U$24.1
  Top 0.254: J8.3 73.5,66.99 v73.63,66.87 | v78.71,64.45 79.88,64.45
  Bottom 0.254: v73.63,66.87 76.29,66.87 v78.71,64.45
XTAL1  (1 unrouted)
  Top 0.152: 43.56,9.32 41.1,11.78 41.1,11.81 40.7,12.21 U$1.15 | C1.1 41.58,6.78 U$3.P$1
XTAL2  (1 unrouted)
  Top 0.152: U$1.16 43.56,16.34 43.56,16.94 | C2.1 41.83,20.24 U$3.P$2
XTAL3  (1 unrouted)
  Top 0.152: 43.56,26.64 41.1,29.1 41.1,29.13 40.7,29.53 U$2.15 | C6.1 41.58,24.1 U$5.P$1
XTAL4  (1 unrouted)
  Top 0.152: U$2.16 43.56,33.66 43.56,34.26 | C7.1 41.83,37.56 U$5.P$2
XTAL5  (1 unrouted)
  Top 0.152: 43.56,43.96 41.1,46.42 41.1,46.45 40.7,46.85 U$7.15 | C11.1 41.58,41.42 U$8.P$1
XTAL6  (1 unrouted)
  Top 0.152: U$7.16 43.56,50.98 43.56,51.58 | C12.1 41.83,54.88 U$8.P$2
XTAL7  (1 unrouted)
  Top 0.152: 43.56,61.28 41.1,63.74 41.1,63.77 40.7,64.17 U$10.15 | C16.1 41.58,58.74 U$11.P$1
XTAL8  (1 unrouted)
  Top 0.152: U$10.16 43.56,68.3 43.56,68.9 | C17.1 41.83,72.2 U$11.P$2
XTAL9  (1 unrouted)
  Top 0.152: 93.31,9.32 90.85,11.78 90.85,11.81 90.45,12.21 U$13.15 | C21.1 91.33,6.78 U$14.P$1
XTAL10  (1 unrouted)
  Top 0.152: U$13.16 93.31,16.34 93.31,16.94 | C22.1 91.58,20.24 U$14.P$2
XTAL11  (1 unrouted)
  Top 0.152: 93.31,26.64 90.85,29.1 90.85,29.13 90.45,29.53 U$16.15 | C26.1 91.33,24.1 U$17.P$1
XTAL12  (1 unrouted)
  Top 0.152: U$16.16 93.31,33.66 93.31,34.26 | C27.1 91.58,37.56 U$17.P$2
XTAL13  (1 unrouted)
  Top 0.152: 93.31,43.96 90.85,46.42 90.85,46.45 90.45,46.85 U$19.15 | C31.1 91.33,41.42 U$20.P$1
XTAL14  (1 unrouted)
  Top 0.152: U$19.16 93.31,50.98 93.31,51.58 | C32.1 91.58,54.88 U$20.P$2
XTAL15  (1 unrouted)
  Top 0.152: 93.31,61.28 90.85,63.74 90.85,63.77 90.45,64.17 U$22.15 | C36.1 91.33,58.74 U$23.P$1
XTAL16  (1 unrouted)
  Top 0.152: U$22.16 93.31,68.3 93.31,68.9 | C37.1 91.58,72.2 U$23.P$2

## Text on the board
tNames: C2 | C2 | R9 | R7 | R9 | R7 | C4 | C4 | R2 | R3 | R2 | R3 | C5 | U4 | C5 | U4 | R5 | R8 | U$4 | R5 | R8 | U$4 | U$1 | U$1 | R6 | C3 | R6 | C3 | R4 | C1 | R4 | C1 | R1 | R1 | C2 | C2 | R7 | R7 | R9 | R9 | C4 | R2 | R3 | C4 | R2 | R3 | C5 | U4 | C5 | U4 | R8 | U$4 | R8 | U$4 | R5 | R5 | U$1 | U$1 | R6 | C3 | R6 | C3 | R4 | C1 | R4 | C1 | R1 | R1 | C2 | C2 | R7 | R7 | R9 | R9 | C4 | C4 | U4 | R2 | R3 | U4 | R2 | R3 | C5 | C5 | R8 | R8 | R5 | U$4 | R5 | U$4 | C3 | U$1 | C3 | U$1 | R4 | R6 | R4 | R6 | C1 | C1 | R1 | R1 | C2 | C2 | R9 | R7 | R9 | R7 | C4 | C4 | R2 | R3 | R2 | R3 | C5 | U4 | C5 | U4 | R5 | R8 | U$4 | R5 | R8 | U$4 | U$1 | U$1 | R6 | C3 | R6 | C3 | R4 | C1 | R4 | C1 | R1 | R1